# EAGLE board leer2 (EAGLE 6.4)
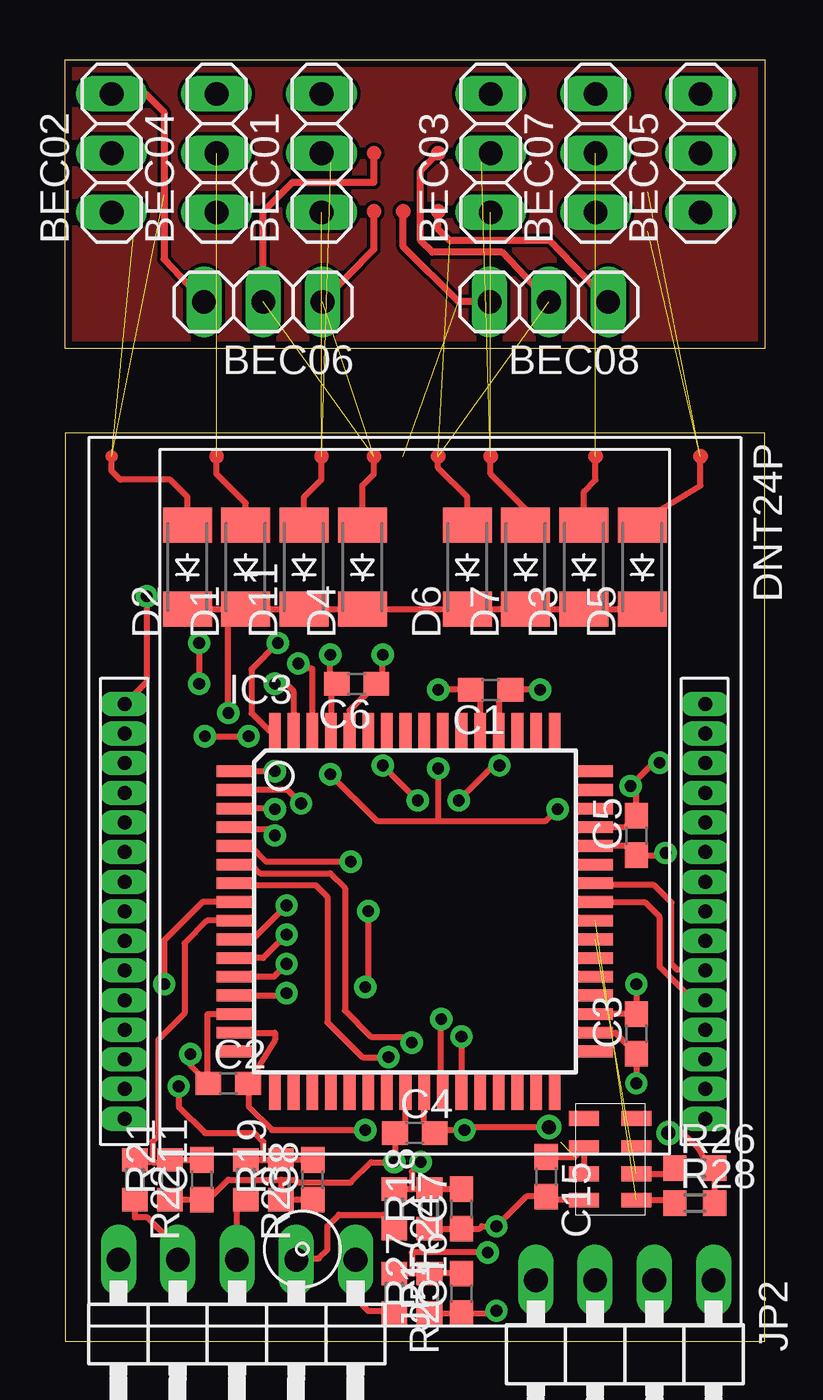
[diagram p0: board, top side]
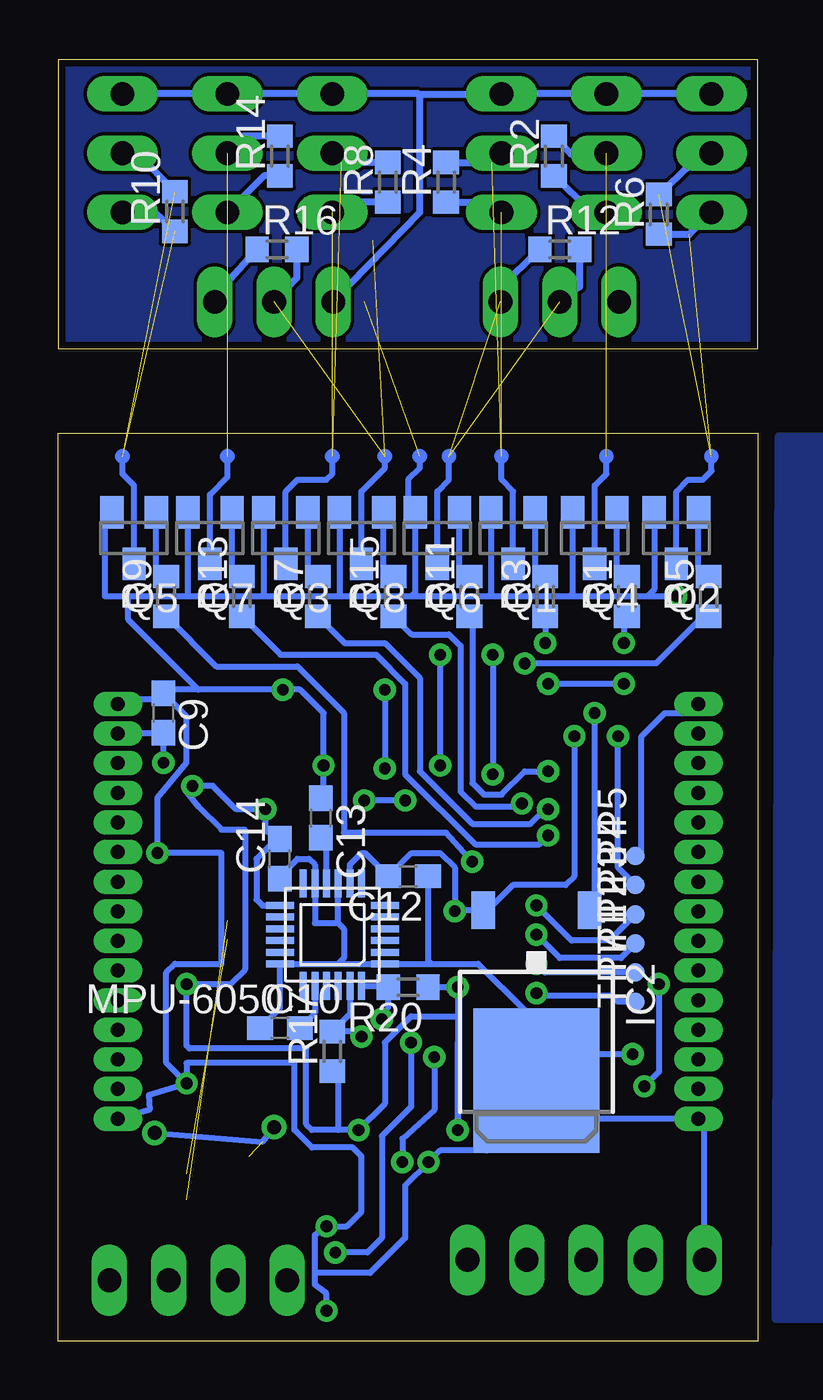
[diagram p1: board, bottom side, seen from below]

Size 30 x 54.92 mm. Coordinates in mm from the lower left corner, seen from the top.
Outline: 30,38.92 0,38.92 0,0 30,0 30,38.92
Outline: 0,54.92 30,54.92 30,42.55 0,42.55 0,54.92
Copper layers (1*2+3*4+5*6+7*16): Top 0.035mm / dielectric 0.2mm / Route2 0.035mm / dielectric 0.15mm / Route3 0.035mm / dielectric 0.2mm / Route4 0.035mm / dielectric 0.15mm / Route5 0.035mm / dielectric 0.2mm / Route6 0.035mm / dielectric 0.15mm / Route7 0.035mm / dielectric 0.2mm / Bottom 0.035mm
Design rules "Eagle_WEdirekt_150_check": minimum track width 6mil, minimum drill 0.25mm, track to track 6mil, track to pad 8mil, pad to pad 8mil, via to via 6mil, smd to smd 8mil, copper to edge 12mil, drill to drill 24mil, minimum pad ring 9mil, minimum via ring 9mil, stop-mask expansion 3mil, vias tented up to drill 0mil, thermal gap 12mil

## Footprints (pad centres in the part's own frame; a part is rotated, then mirrored left to right if it is on the bottom)
1X03 = drill 1.016 long: 1 -2.54,0; 2 0,0; 3 2.54,0
C0603 = smd 1.1 x 1: 1 -0.85,0; 2 0.85,0
SOD-123_MINI-SMA = smd 1.5 x 2.1: A 1.8,0; C -1.8,0
TO252 = smd 1 x 1.6: 1 -2.28,-4.8; 2 2.28,-4.8 | smd 5.4 x 6.2: 3 0,2.5
TQFP-64 = smd 1.5 x 0.5: 1 -7.75,6; 2 -7.75,5.2; 3 -7.75,4.4; 4 -7.75,3.6; 5 -7.75,2.8; 6 -7.75,2; 7 -7.75,1.2; 8 -7.75,0.4; 9 -7.75,-0.4; 10 -7.75,-1.2; 11 -7.75,-2; 12 -7.75,-2.8; 13 -7.75,-3.6; 14 -7.75,-4.4; 15 -7.75,-5.2; 16 -7.75,-6; 33 7.75,-6; 34 7.75,-5.2; 35 7.75,-4.4; 36 7.75,-3.6; 37 7.75,-2.8; 38 7.75,-2; 39 7.75,-1.2; 40 7.75,-0.4; 41 7.75,0.4; 42 7.75,1.2; 43 7.75,2; 44 7.75,2.8; 45 7.75,3.6; 46 7.75,4.4; 47 7.75,5.2; 48 7.75,6 | smd 0.5 x 1.5: 17 -6,-7.75; 18 -5.2,-7.75; 19 -4.4,-7.75; 20 -3.6,-7.75; 21 -2.8,-7.75; 22 -2,-7.75; 23 -1.2,-7.75; 24 -0.4,-7.75; 25 0.4,-7.75; 26 1.2,-7.75; 27 2,-7.75; 28 2.8,-7.75; 29 3.6,-7.75; 30 4.4,-7.75; 31 5.2,-7.75; 32 6,-7.75; 49 6,7.75; 50 5.2,7.75; 51 4.4,7.75; 52 3.6,7.75; 53 2.8,7.75; 54 2,7.75; 55 1.2,7.75; 56 0.4,7.75; 57 -0.4,7.75; 58 -1.2,7.75; 59 -2,7.75; 60 -2.8,7.75; 61 -3.6,7.75; 62 -4.4,7.75; 63 -5.2,7.75; 64 -6,7.75
1X05/90 = drill 1.016 long: 1 -5.08,-3.81; 2 -2.54,-3.81; 3 0,-3.81; 4 2.54,-3.81; 5 5.08,-3.81
1X04/90 = drill 1.016 long: 1 -3.81,-3.81; 2 -1.27,-3.81; 3 1.27,-3.81; 4 3.81,-3.81
SOT23 = smd 1 x 1.4: 1 -0.95,-1.1; 2 0.95,-1.1; 3 0,1.1
R0603 = smd 1 x 1.1: 1 -0.85,0; 2 0.85,0
TP08R = smd 0.8 x 0.8: TP 0,0
DNT24P_RADIO_MODULE = drill 0.6 pad 0.889 long: P1 8.89,12.446; P2 7.62,12.446; P3 6.35,12.446; P4 5.08,12.446; P5 3.81,12.446; P6 2.54,12.446; P7 1.27,12.446; P8 0,12.446; P9 -1.27,12.446; P10 -2.54,12.446; P11 -3.81,12.446; P12 -5.08,12.446; P13 -6.35,12.446; P14 -7.62,12.446; P15 -8.89,12.446; P16 -8.89,-12.446; P17 -7.62,-12.446; P18 -6.35,-12.446; P19 -5.08,-12.446; P20 -3.81,-12.446; P21 -2.54,-12.446; P22 -1.27,-12.446; P23 0,-12.446; P24 1.27,-12.446; P25 2.54,-12.446; P26 3.81,-12.446; P27 5.08,-12.446; P28 6.35,-12.446; P29 7.62,-12.446; P30 8.89,-12.446
01BA03 = smd 1.27 x 0.635: P$1 2.625,4.125; P$2 2.625,3; P$3 2.625,1.875; P$4 2.625,0.625; P$5 0.375,0.625; P$6 0.375,1.875; P$7 0.375,3; P$8 0.375,4.125
MPU-6050_ACC_GYRO = smd 1.2 x 0.3: P1 -2.25,1.25; P2 -2.25,0.75; P3 -2.25,0.25; P4 -2.25,-0.25; P5 -2.25,-0.75; P6 -2.25,-1.25; P13 2.25,-1.25; P14 2.25,-0.75; P15 2.25,-0.25; P16 2.25,0.25; P17 2.25,0.75; P18 2.25,1.25 | smd 0.3 x 1.2: P7 -1.25,-2.2; P8 -0.75,-2.2; P9 -0.25,-2.2; P10 0.25,-2.2; P11 0.75,-2.2; P12 1.25,-2.2; P19 1.25,2.2; P20 0.75,2.2; P21 0.25,2.2; P22 -0.25,2.2; P23 -0.75,2.2; P24 -1.25,2.2

## Placement (x,y rotation side)
BEC01  PCM  [1X03]  11,50.92 90 top
BEC02  PCM  [1X03]  2,50.92 90 top
BEC03  PCM  [1X03]  18.25,50.92 90 top
BEC04  PCM  [1X03]  6.5,50.92 90 top
BEC05  PCM  [1X03]  27.25,50.92 90 top
BEC06  PCM  [1X03]  8.5,44.55 180 top
BEC07  PCM  [1X03]  22.75,50.92 90 top
BEC08  PCM  [1X03]  20.75,44.55 180 top
C1  [C0603]  18.25,27.93 180 top
C2  [C0603]  7,11.05 0 top
C3  [C0603]  24.5,13.18 90 top
C4  [C0603]  15,8.93 0 top
C5  [C0603]  24.5,21.68 90 top
C6  [C0603]  12.5,28.18 180 top
C7  [C0603]  17,5.67 90 top
C8  [C0603]  10.62,6.92 90 top
C9  [C0603]  25.5,26.93 270 bottom
C10  [C0603]  20.5,13.43 0 bottom
C11  [C0603]  5.88,6.92 90 top
C12  [C0603]  15,19.93 180 bottom
C13  [C0603]  18.75,22.43 270 bottom
C14  [C0603]  20.5,20.68 90 bottom
C15  [C0603]  20.62,7.05 270 top
C16  [C0603]  17,2.05 90 top
D1  B 140 F  [SOD-123_MINI-SMA]  7.75,33.17 90 top
D2  B 140 F  [SOD-123_MINI-SMA]  5.25,33.17 90 top
D3  B 140 F  [SOD-123_MINI-SMA]  22.25,33.17 90 top
D4  B 140 F  [SOD-123_MINI-SMA]  12.75,33.17 90 top
D5  B 140 F  [SOD-123_MINI-SMA]  24.75,33.17 90 top
D6  B 140 F  [SOD-123_MINI-SMA]  17.25,33.17 90 top
D7  B 140 F  [SOD-123_MINI-SMA]  19.75,33.17 90 top
D11  B 140 F  [SOD-123_MINI-SMA]  10.25,33.17 90 top
IC2  7805DT  [TO252]  9.5,13.68 180 bottom
IC3  [TQFP-64]  15,18.43 0 top
JP1  [1X05/90]  7.38,-0.32 180 top
JP2  [1X04/90]  24,-1.2 180 top
Q1  BC846BSMD  [SOT23]  10.5,34.42 180 bottom
Q2  BC846BSMD  [SOT23]  3.5,34.42 180 bottom
Q3  BC846BSMD  [SOT23]  20.25,34.42 180 bottom
Q4  BC846BSMD  [SOT23]  7,34.42 180 bottom
Q5  BC846BSMD  [SOT23]  26.75,34.42 180 bottom
Q6  BC846BSMD  [SOT23]  13.75,34.42 180 bottom
Q7  BC846BSMD  [SOT23]  23.5,34.42 180 bottom
Q8  BC846BSMD  [SOT23]  17,34.42 180 bottom
R1  [R0603]  5.62,31.93 90 bottom
R2  [R0603]  8.75,50.8 90 bottom
R3  [R0603]  9.12,31.93 90 bottom
R4  [R0603]  13.38,49.67 90 bottom
R5  [R0603]  2.12,31.93 90 bottom
R6  [R0603]  4.25,48.3 90 bottom
R7  [R0603]  18.88,31.93 90 bottom
R8  [R0603]  15.88,49.67 90 bottom
R9  [R0603]  25.38,31.93 90 bottom
R10  [R0603]  25,48.42 90 bottom
R11  [R0603]  12.38,31.93 90 bottom
R12  [R0603]  8.5,46.8 0 bottom
R13  [R0603]  22.12,31.93 90 bottom
R14  [R0603]  20.5,50.8 90 bottom
R15  [R0603]  15.62,31.93 90 bottom
R16  [R0603]  20.62,46.8 0 bottom
R17  [R0603]  18.25,12.43 90 bottom
R18  [R0603]  15.62,5.67 90 top
R19  [R0603]  9.25,6.92 90 top
R20  [R0603]  15,15.18 180 bottom
R21  [R0603]  4.5,6.92 90 top
R22  [R0603]  3,6.92 270 top
R23  [R0603]  7.75,6.92 270 top
R24  [R0603]  14.12,5.67 270 top
R25  [R0603]  14.12,2.05 270 top
R26  [R0603]  27,7.42 0 top
R27  [R0603]  15.62,2.05 90 top
R28  [R0603]  27,5.92 0 top
TP1  TPTP08R  [TP08R]  5.25,15.8 90 bottom
TP2  TPTP08R  [TP08R]  5.25,17.05 90 bottom
TP3  TPTP08R  [TP08R]  5.25,18.3 90 bottom
TP4  TPTP08R  [TP08R]  5.25,19.55 90 bottom
TP5  TPTP08R  [TP08R]  5.25,20.8 90 bottom
TP7  TPTP08R  [TP08R]  5.25,14.55 90 bottom
U$1  DNT24P_RADIO_MODULE  [DNT24P_RADIO_MODULE]  15,18.43 270 top
U$2  MS5611  [01BA03]  24.88,10.18 180 top
U$3  MPU-6050_ACC_GYRO  [MPU-6050_ACC_GYRO]  18.25,17.43 180 bottom

## Library data of the parts
BEC01-BEC08 JP1 JP2 = pinhead
C1-C16 = eagle-ltspice; SPICEMODEL: NONE; SPICEPREFIX: C
D1-D7 D11 = diode
IC2 = linear
IC3 = ATxmega__A3
Q1-Q8 = transistor-npn
R1-R28 = eagle-ltspice; SPICEMODEL: NONE; SPICEPREFIX: R
TP1-TP5 TP7 = testpad
U$1 U$3 = USER PARTS
U$2 = ms5611

## Nets
+3V3: C1.2 C2.2 C3.2 C4.2 C5.2 C6.2 C9.2 C12.2 C14.2 C15.1 IC2.2 IC3.15 IC3.25 IC3.35 IC3.45 IC3.53 IC3.61 R17.1 R20.1 R26.2 R28.2 TP4.TP U$1.P14 U$2.P$2 U$2.P$3 U$3.P8 U$3.P13
GND: BEC01.3 BEC02.3 BEC03.3 BEC04.3 BEC05.3 BEC06.3 BEC07.3 BEC08.3 C1.1 C2.1 C3.1 C4.1 C5.1 C6.1 C7.1 C8.1 C9.1 C10.1 C11.1 C12.1 C13.1 C14.1 C15.2 C16.1 IC2.3 IC3.14 IC3.24 IC3.34 IC3.44 IC3.52 IC3.60 JP1.5 Q1.2 Q2.2 Q3.2 Q4.2 Q5.2 Q6.2 Q7.2 Q8.2 R18.1 R19.1 R21.1 R27.1 TP5.TP U$1.P1 U$1.P15 U$1.P16 U$1.P30 U$2.P$1 U$3.P1 U$3.P9 U$3.P11 U$3.P18
N$1: Q4.1 R1.2
N$2: BEC01.1 Q1.3 R4.1
N$3: BEC01.2 D11.A R4.2
N$4: Q1.1 R3.2
N$5: BEC02.1 Q2.3 R6.1
N$6: BEC02.2 D2.A R6.2
N$7: Q2.1 R5.2
N$8: BEC03.1 Q3.3 R8.1
N$9: BEC03.2 D7.A R8.2
N$10: Q3.1 R7.2
N$11: BEC05.1 Q5.3 R10.1
N$12: BEC05.2 D5.A R10.2
N$13: Q5.1 R9.2
N$14: BEC04.1 Q4.3 R2.1
N$15: BEC04.2 D1.A R2.2
N$16: BEC06.1 Q6.3 R12.1
N$17: BEC06.2 D4.A R12.2
N$18: Q6.1 R11.2
N$19: BEC07.1 Q7.3 R14.1
N$20: BEC07.2 D3.A R14.2
N$21: Q7.1 R13.2
N$22: BEC08.1 Q8.3 R16.1
N$23: BEC08.2 D6.A R16.2
N$24: Q8.1 R15.2
N$25: IC3.63 R1.1
N$26: IC3.64 R3.1
N$27: IC3.5 R9.1
N$28: IC3.4 R13.1
N$29: IC3.62 R5.1
N$30: IC3.1 R11.1
N$31: IC3.2 R15.1
N$32: IC3.3 R7.1
N$33: IC3.41 U$1.P5
N$34: D1.C D2.C D3.C D4.C D5.C D6.C D7.C D11.C IC2.1
N$35: C10.2 U$3.P20
N$36: IC3.42 U$1.P6
N$37: C13.2 U$3.P10
N$38: IC3.10 TP3.TP
N$39: IC3.11 TP2.TP
N$40: IC3.12 TP1.TP
N$41: IC3.13 TP7.TP
N$42: JP1.2 R24.2
N$43: JP1.3 R23.2
N$44: JP1.4 R22.2
N$46: IC3.40 R28.1 U$2.P$8
N$47: IC3.39 R26.1 U$2.P$7
N$50: JP1.1 R25.2
PB0: C16.2 IC3.6 R25.1 R27.2
PB1: C7.2 IC3.7 R18.2 R24.1
PB2: C8.2 IC3.8 R19.2 R23.1
PB3: C11.2 IC3.9 R21.2 R22.1
PF0: IC3.26 R20.2 U$3.P24
PF1: IC3.27 R17.2 U$3.P23

## Tracks (layer width: path | path; a pad name or v marks a point on that pad's centre or on a via)
+3V3  (via drill 0.5, 0.5 pad 0.25, 0.5 pad 0.81, 0.6)  (1 unrouted)
  Top 0.254: v24.5,15.3 C3.2 IC3.35 | v16,27.93 C1.2 17.8,27.53 IC3.53 | v11.38,29.43 11.38,28.68 11.5,28.03 C6.2 11.4,27.93 IC3.61 | IC3.45 24,22.03 C5.2 24.5,23.55 v24.25,23.8 25.25,24.8 v25.5,24.8 | IC3.25 15.4,9.38 C4.2 16,9.05 v17.12,9.05 17.25,9.18 v20.75,9.18 | v16,24.55 16,22.3 | v11.38,24.3 13.38,22.3 16,22.3 | 16,22.3 20.62,22.3 v21.12,22.8 | v12.88,9.05 8.88,9.05 7.88,10.05 C2.2 9,12.93 9,13.23 IC3.15 | v13,18.43 13,15.3 v12.88,15.18 | v6,25.93 v7.88,25.93 | U$2.P$2 U$2.P$3 21.85,7.9 C15.1 | R28.2 R26.2 27.62,7.42 27.12,8.3 26.5,8.93 v25.88,8.93
  Bottom 0.254: U$1.P14 27.23,26.07 C9.2 v25.5,24.8 | 18,9.05 v17.12,9.05 16,10.18 16,12.8 14.88,13.93 12.88,13.93 | 18,9.05 19.12,9.05 19.38,9.3 19.38,12.55 24.38,12.55 24.5,12.68 v24.5,15.3 22.62,15.3 22,15.93 22,21.93 23,21.93 24,22.93 24.5,23.55 v24.25,23.8 23.38,23.8 22.38,22.8 v21.12,22.8 21.12,21.9 C14.2 20.65,21.53 21.5,20.68 21.5,18.93 21.25,18.68 U$3.P13 | v11.38,29.43 v11.38,24.3 | v16,27.93 v16,24.55 | 12.88,12.8 v12.88,9.05 12.88,13.93 | 12.88,13.93 v12.88,15.18 R20.1 | 11.7,18.48 IC2.2 | 18,9.05 18,11.53 18.1,11.62 R17.1 | U$3.P8 17.5,20.43 17,20.93 16.85,20.93 C12.2 14.85,20.93 13.62,20.93 13,20.3 v13,18.43 12.82,18.48 IC2.2 | TP4.TP 6,20.3 v6,25.93 | v7.88,25.93 7.88,19.93 8.25,19.55 10.5,19.55 11.57,18.48 IC2.2 | v25.88,8.93 21.25,8.55 v20.75,9.18
GND  (via drill 0.5)  (1 unrouted)
  Top 0.254: v3.5,31.93 3.5,28.26 U$1.P16 | v25.75,20.93 25.52,20.82 C5.1 24.1,21.23 IC3.44 | v24.5,11.05 C3.1 23.6,13.23 IC3.34 | C2.1 5.78,11.43 | C1.1 19,28.03 | IC3.60 12.2,27.03 C6.1 13.35,28.32 13.62,28.48 v13.62,29.43 | C1.1 18.6,27.43 IC3.52 | C2.1 6.12,11.05 6.12,14.03 IC3.14 | IC3.24 14.6,9.38 C4.1 14.15,8.08 v14.12,7.67 13.12,7.67 12.25,6.8 10,6.8 9.88,6.92 9.28,6.92 | v20.38,27.93 C1.1 | v13.62,24.68 v15.12,23.18 | R21.1 C11.1 6.15,6.08 7,6.92 9.28,6.92 | 9.28,6.92 R19.1 C8.1 | R27.1 C16.1 18.4,1.2 v18.5,1.3 | C7.1 R18.1 17.77,4.83 17.88,4.92 v18.5,4.92 19.77,6.2 C15.2 20.77,6.05 U$2.P$1 | v18.62,24.68 18.38,24.68 v16.88,23.18 | v5.38,12.3 5.38,11.83 C2.1
  Top 0.305: BEC02.3 3.46,53.46 4.25,52.67 4.25,46.38 BEC06.3 | BEC08.3 16.88,44.55 14.5,46.92 14.5,48.42
  Bottom 0.254: Q2.2 4.45,32.22 4.75,31.93 | v3.5,31.93 4.75,31.93 | 4.75,31.93 8.12,31.93 | 8.12,31.93 11.62,31.93 | 11.62,31.93 14.88,31.93 | 14.88,31.93 17.88,31.93 | 17.88,31.93 21.12,31.93 | 21.12,31.93 24.5,31.93 | 24.5,31.93 27,31.93 | 27,31.93 28,31.93 28,34.92 27.7,35.22 Q5.2 28,35.22 | Q4.2 7.95,31.97 8.12,31.93 | Q1.2 11.45,31.97 11.62,31.93 | 14.88,31.93 14.7,32.1 Q6.2 15,35.82 15,36.92 14.5,37.42 14.5,37.92 | 17.88,31.93 17.95,31.97 Q8.2 17.95,35.97 | Q3.2 21.2,31.97 21.12,31.93 | Q7.2 24.45,31.97 24.5,31.93 | U$1.P15 27.24,27.53 25.75,27.53 C9.1 | 27,31.93 27,30.93 24,27.93 | v13.62,29.43 v13.62,24.68 | 24,27.93 v20.38,27.93 19.62,27.93 18.62,26.93 v18.62,24.68 18.62,23.55 18.4,23.32 C13.1 | 24,27.93 25.6,27.93 C9.1 | C9.1 24.5,26.78 24.5,24.8 25.75,23.3 v25.75,20.93 23,20.93 23,16.18 25,16.18 25.38,15.8 25.38,11.93 v24.5,11.05 | v24.5,11.05 24.5,11.93 19.88,11.93 19.88,9.05 19.12,8.3 17.38,8.3 17,7.92 17,5.55 17.62,4.92 v18.5,4.92 19,4.55 19,2.92 | v15.12,23.18 v16.88,23.18 | U$1.P1 26.09,9.93 26.12,10.55 v24.5,11.05 | 18,16.18 U$3.P18 20.5,14.28 C10.1 | 18,16.18 U$3.P1 14,16.18 | 14,16.18 12,16.18 10,14.18 10,12.93 | 10,12.93 IC2.3 9.5,9.93 | 18,17.93 19,17.93 U$3.P11 19,20.43 19.25,20.68 19.75,20.68 20.5,19.93 C14.1 | 18,17.93 U$3.P9 | v5.38,12.3 7.62,12.3 8.25,13.68 9.25,13.43 10,12.93 | 18,17.93 17.75,17.68 17.75,16.43 18,16.18 | 14,16.18 14.12,16.3 14.12,19.9 C12.1 | 9.5,9.93 8,9.93 8,9.54 U$1.P30 2.29,9.28 JP1.5 | 9.5,9.93 9.5,8.43 11.62,8.18 13.62,8.18 v14.12,7.67 15.12,6.67 15.12,4.42 16.62,2.92 19,2.92 | TP5.TP 5,20.8 5,25.93 4,26.93 2.94,26.93 U$1.P16 | 19,2.92 19,2.42 18.5,2.05 v18.5,1.3 18.4,1.2 18.38,1.2
  Bottom 0.305: BEC02.3 BEC04.3 BEC01.3 11.71,53.46 11.75,53.42 14.5,53.42 | BEC03.3 BEC07.3 BEC05.3 | BEC08.3 14.5,48.38 14.5,53.42 | 17.29,53.46 BEC03.3 | 14.5,53.42 14.54,53.46 BEC03.3
N$1
  Bottom 0.254: R1.2 6.05,33.07 Q4.1
N$2  (1 unrouted)
  Bottom 0.254: Q1.3 10.5,36.42 11,36.92 11,37.92
  Bottom 0.305: R4.1 11.44,48.82 BEC01.1
N$3  (1 unrouted)
  Top 0.254: D11.A 10.25,36.17 11,36.92 11,37.92
  Bottom 0.305: R4.2 11.4,50.52 BEC01.2
N$4
  Bottom 0.254: R3.2 9.55,33.07 Q1.1
N$5  (1 unrouted)
  Bottom 0.254: Q2.3 3.5,36.42 3,36.92 2.38,36.92 2,37.3 2,37.92
  Bottom 0.305: R6.1 2.94,47.45 BEC02.1
N$6  (1 unrouted)
  Top 0.254: D2.A 5.25,36.17 4.5,36.92 2.38,36.92 2,37.3 2,37.92
  Bottom 0.305: R6.2 2.4,50.9 BEC02.2
N$7
  Bottom 0.254: R5.2 2.55,33.07 Q2.1
N$8  (1 unrouted)
  Bottom 0.254: Q3.3 20.25,36.42 19.75,36.92 18.5,36.92 18.25,37.17 18.25,37.92
  Bottom 0.305: R8.1 17.81,48.82 BEC03.1
N$9  (1 unrouted)
  Top 0.254: D7.A 19.75,35.67 18.25,37.17 18.25,37.92
  Bottom 0.305: R8.2 17.85,50.52 BEC03.2
N$10
  Bottom 0.254: R7.2 19.3,33.07 Q3.1
N$11  (1 unrouted)
  Bottom 0.254: Q5.3 26.75,36.67 27.25,37.17 27.25,37.92
  Bottom 0.305: R10.1 25.81,48.32 BEC05.1
N$12  (1 unrouted)
  Top 0.254: D5.A 24.75,35.17 27.25,36.67 27.25,37.92
  Bottom 0.305: R10.2 26.6,50.9 BEC05.2
N$13
  Bottom 0.254: R9.2 25.8,33.07 Q5.1
N$14  (1 unrouted)
  Bottom 0.254: Q4.3 7,36.67 6.5,37.17 6.5,37.92
  Bottom 0.305: R2.1 7.19,48.45 BEC04.1
N$15  (1 unrouted)
  Top 0.254: D1.A 7.75,35.92 6.5,37.17 6.5,37.92
  Bottom 0.305: R2.2 8.03,50.9 BEC04.2
N$16  (1 unrouted)
  Top 0.305: BEC06.1 13.25,46.8 13.25,48.42
  Bottom 0.254: Q6.3 13.75,36.42 13.25,36.92 13.25,37.92
  Bottom 0.305: R12.1 11.1,45.11 BEC06.1
N$17  (1 unrouted)
  Top 0.254: D4.A 12.75,36.67 13.25,37.17 13.25,37.92
  Top 0.305: BEC06.2 8.5,48.42 9.75,49.67 13.25,49.67 13.25,50.92
  Bottom 0.305: R12.2 7.65,45.2 BEC06.2
N$18
  Bottom 0.254: R11.2 12.8,33.07 Q6.1
N$19  (1 unrouted)
  Bottom 0.254: Q7.3 23.5,36.3 22.75,37.05 22.75,37.92
  Bottom 0.305: R14.1 21.18,49.95 BEC07.1
N$20  (1 unrouted)
  Top 0.254: D3.A 22.25,36.42 22.75,36.92 22.75,37.92
  Bottom 0.305: R14.2 22.1,51.65 BEC07.2
N$21
  Bottom 0.254: R13.2 22.55,33.07 Q7.1
N$22  (1 unrouted)
  Top 0.305: BEC08.1 20.79,47.17 16.5,47.17 16,47.67 16,48.42
  Bottom 0.254: Q8.3 17,36.42 16,37.42 16,37.92
  Bottom 0.305: R16.1 23.23,44.86 BEC08.1
N$23  (1 unrouted)
  Top 0.254: D6.A 17.25,36.17 16,37.42 16,37.92
  Top 0.305: BEC08.2 18.75,46.67 15.75,46.67 15.25,47.17 15.25,50.17 16,50.92
  Bottom 0.305: R16.2 19.77,45.57 BEC08.2
N$24
  Bottom 0.254: R15.2 16.05,33.07 Q8.1
N$25  (via drill 0.5, 0.5 pad 0.25)
  Top 0.254: v5.75,29.93 v5.75,28.18 | IC3.63 9.8,27.88 9.55,28.12 v9,28.18
  Bottom 0.254: R1.1 5.75,30.8 v5.75,29.93 | v5.75,28.18 v9,28.18
N$26  (via drill 0.5)
  Top 0.254: v9.12,29.93 8,28.8 8,26.93 8.75,26.18 IC3.64
  Bottom 0.254: R3.1 v9.12,29.93
N$27  (via drill 0.5)
  Top 0.254: v12.25,20.55 8.62,20.55 7.95,21.23 IC3.5
  Bottom 0.254: R9.1 23.23,28.93 19.75,28.93 17.75,26.93 17.75,21.8 13.38,21.8 v12.25,20.55
N$28  (via drill 0.5)
  Top 0.254: v9,21.68 8.75,21.93 8,21.93 7.9,22.03 IC3.4
  Bottom 0.254: R13.1 20.48,29.43 16.38,29.43 15.12,28.18 15.12,24.3 12.12,21.3 9.38,21.3 v9,21.68
N$29  (via drill 0.5)
  Top 0.254: IC3.62 10.6,28.82 10.22,28.82 v10,29.05
  Bottom 0.254: R5.1 2,30.93 2.5,30.93 4.38,29.05 v10,29.05
N$30  (via drill 0.5)
  Top 0.254: v9,24.43 IC3.1
  Bottom 0.254: R11.1 12.25,30.82 12.25,23.93 11.75,23.43 11,23.43 10,24.43 v9,24.43
N$31  (via drill 0.5)
  Top 0.254: v10.12,23.05 9.55,23.62 IC3.2
  Bottom 0.254: R15.1 14.85,30.3 13.25,30.3 12.75,29.8 12.75,23.55 12.12,22.93 10.25,22.93 v10.12,23.05
N$32  (via drill 0.5)
  Top 0.254: v9,22.8 8.9,22.82 IC3.3
  Bottom 0.254: R7.1 17.73,29.93 16,29.93 14.5,28.43 14.5,24.43 12.25,22.18 9.75,22.18 9.12,22.8 v9,22.8
N$33
  Top 0.254: U$1.P5 26.93,14.62 25.5,16.05 25.5,18.18 24.88,18.8 22.77,18.8 IC3.41
N$34  (via drill 0.5)
  Top 0.254: 5,31.38 D2.C 7,31.38 | 7,31.38 D1.C D11.C D4.C D6.C D7.C D3.C D5.C | v7,26.93 7,31.38
  Bottom 0.254: IC2.1 7,19.2 v7,26.93
N$35
  Bottom 0.254: U$3.P20 19,14.08 C10.2 19.6,13.58
N$36
  Top 0.254: U$1.P6 27.25,15.93 26.25,15.93 26,16.18 26,18.8 25.25,19.55 22.82,19.55 IC3.42
N$37
  Bottom 0.254: U$3.P10 18.5,21.43 C13.2
N$38  (via drill 0.5 pad 0.25)
  Top 0.254: v9.5,18.68 8.05,17.23 IC3.10
  Bottom 0.254: TP3.TP 6.38,17.18 8,17.18 v9.5,18.68
N$39  (via drill 0.5 pad 0.25)
  Top 0.254: v9.5,17.43 8.5,16.43 IC3.11
  Bottom 0.254: TP2.TP 5.88,16.43 8.5,16.43 v9.5,17.43
N$40  (via drill 0.5 pad 0.25)
  Top 0.254: v9.5,16.18 8.95,15.62 IC3.12
  Bottom 0.254: TP1.TP 9.12,15.8 v9.5,16.18
N$41  (via drill 0.5 pad 0.25)
  Top 0.254: v9.5,14.93 9.38,14.8 7.28,14.8 IC3.13
  Bottom 0.254: TP7.TP 6,14.55 6.25,14.8 9.38,14.8 v9.5,14.93
N$42
  Top 0.254: JP1.2 9.91,3.84 9.88,3.55 10.88,3.55 11.25,3.92 11.25,4.92 11.75,5.42 13.65,5.42 R24.2
N$43
  Top 0.254: JP1.3 7.38,5.7 R23.2
N$44
  Top 0.254: JP1.4 4.83,3.99 3.53,5.3 3,5.3 R22.2
N$46  (1 unrouted)
  Top 0.254: U$2.P$8 26.02,6.05 R28.1
N$47  (1 unrouted)
  Top 0.254: U$2.P$7 25.9,7.17 R26.1
N$50
  Top 0.254: JP1.1 12.46,1.84 13,1.3 14.03,1.3 R25.2
PB0  (via drill 0.5)
  Top 0.254: IC3.6 8,20.43 8.38,20.05 11.38,20.05 12,19.43 12,14.18 13.12,13.05 14.62,13.05 v14.88,12.8 | R25.1 14.88,2.9 | 14.88,2.9 R27.2 C16.2 | v18.12,3.8 14.88,3.8 14.88,2.9
  Bottom 0.254: v14.88,12.8 14.88,10.05 16.12,8.8 16.12,4.42 16.75,3.8 v18.12,3.8
PB1  (via drill 0.5)
  Top 0.254: IC3.7 7.43,19.62 7.5,19.55 10.75,19.55 11.25,19.05 11.25,13.68 12.75,12.18 v13.88,12.18 | R24.1 14.88,6.52 | 14.88,6.52 R18.2 C7.2 | v15.25,7.67 14.88,7.27 14.88,6.52
  Bottom 0.254: v13.88,12.18 13.88,9.93 15.25,8.68 v15.25,7.67
PB2  (via drill 0.5)
  Top 0.254: R23.1 8.5,7.77 | 8.5,7.77 R19.2 C8.2 | IC3.8 5.9,18.82 4.25,17.18 v4.25,15.3 | v4.88,10.93 4.88,10.05 6,8.93 8.12,8.93 8.5,8.55 8.5,7.77
  Bottom 0.254: v4.25,15.3 4.25,11.55 v4.88,10.93
PB3
  Top 0.254: IC3.9 6.1,18.03 5.12,17.05 5.12,14.05 4,12.93 4,8.8 3.75,8.55 3.75,7.67 | 3.75,7.67 3.1,7.67 R22.1 | 3.75,7.67 4.4,7.67 R21.2 C11.2
PF0  (via drill 0.5)
  Top 0.254: IC3.26 16.12,10.48 v16.12,13.8
  Bottom 0.254: U$3.P24 15.9,15.23 R20.2 15.85,14.33 v16.12,13.8
PF1  (via drill 0.5)
  Top 0.254: v17,13.05 IC3.27
  Bottom 0.254: U$3.P23 17.5,14.03 R17.2 | 18.15,13.33 R17.2 | v17,13.05 17.23,13.28 R17.2
POLY1
  pour Bottom: 0.25,54.67 29.75,54.67 29.75,42.67 0.25,42.67
POLY2
  pour Top: 0.25,54.67 29.75,54.67 29.75,42.67 0.25,42.67
POLY3
  pour Top (isolate 0.406): -4.75,38.8 -13.25,39.8 -13.25,1.93 -4.75,0.93
POLY4
  pour Bottom (isolate 0.406): -0.88,38.8 -4.25,38.8 -4.25,0.93 -0.75,0.93
(copper drawn outside any net)
  shapes: Bottom circle x9, Top circle x13